# EAGLE board adonAA (EAGLE 6.5.0)
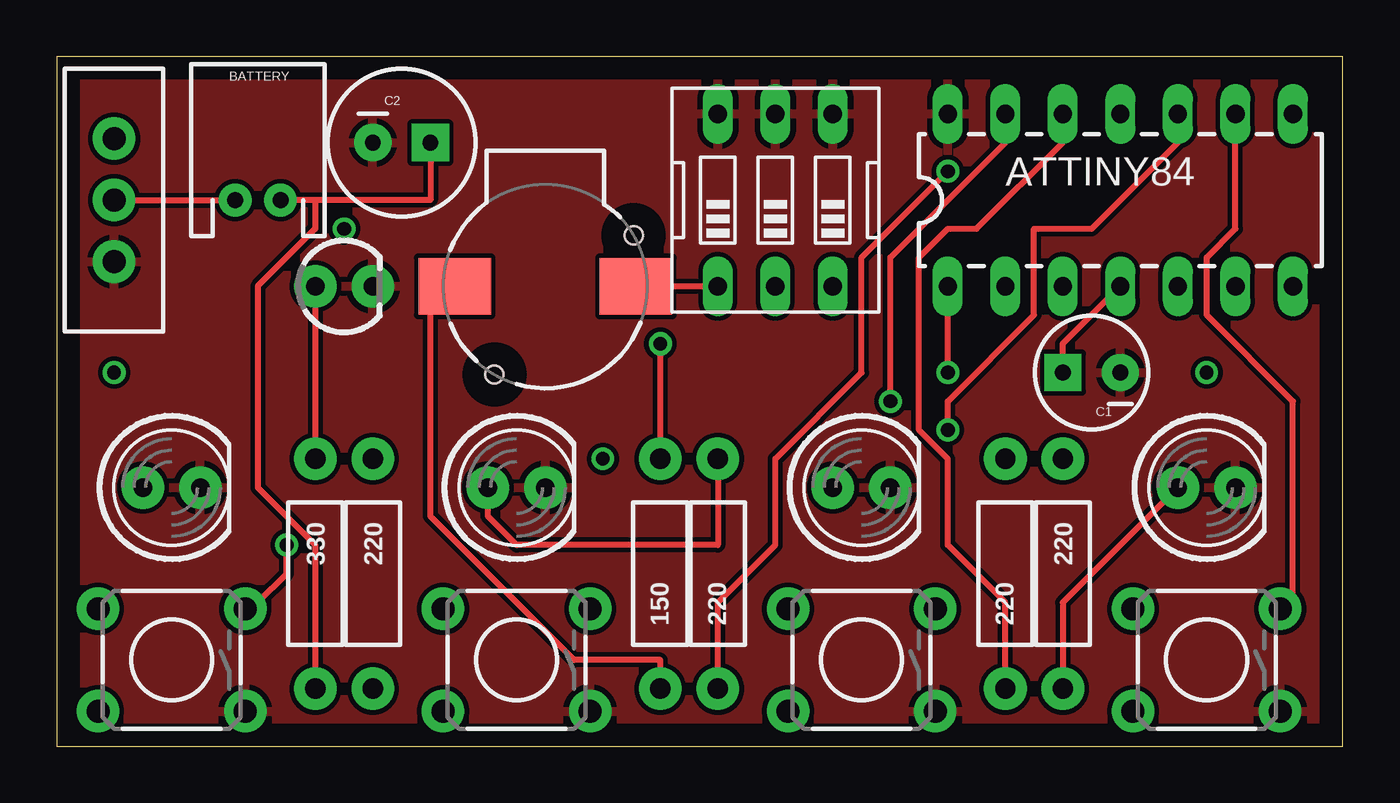
[diagram p0: board, top side]
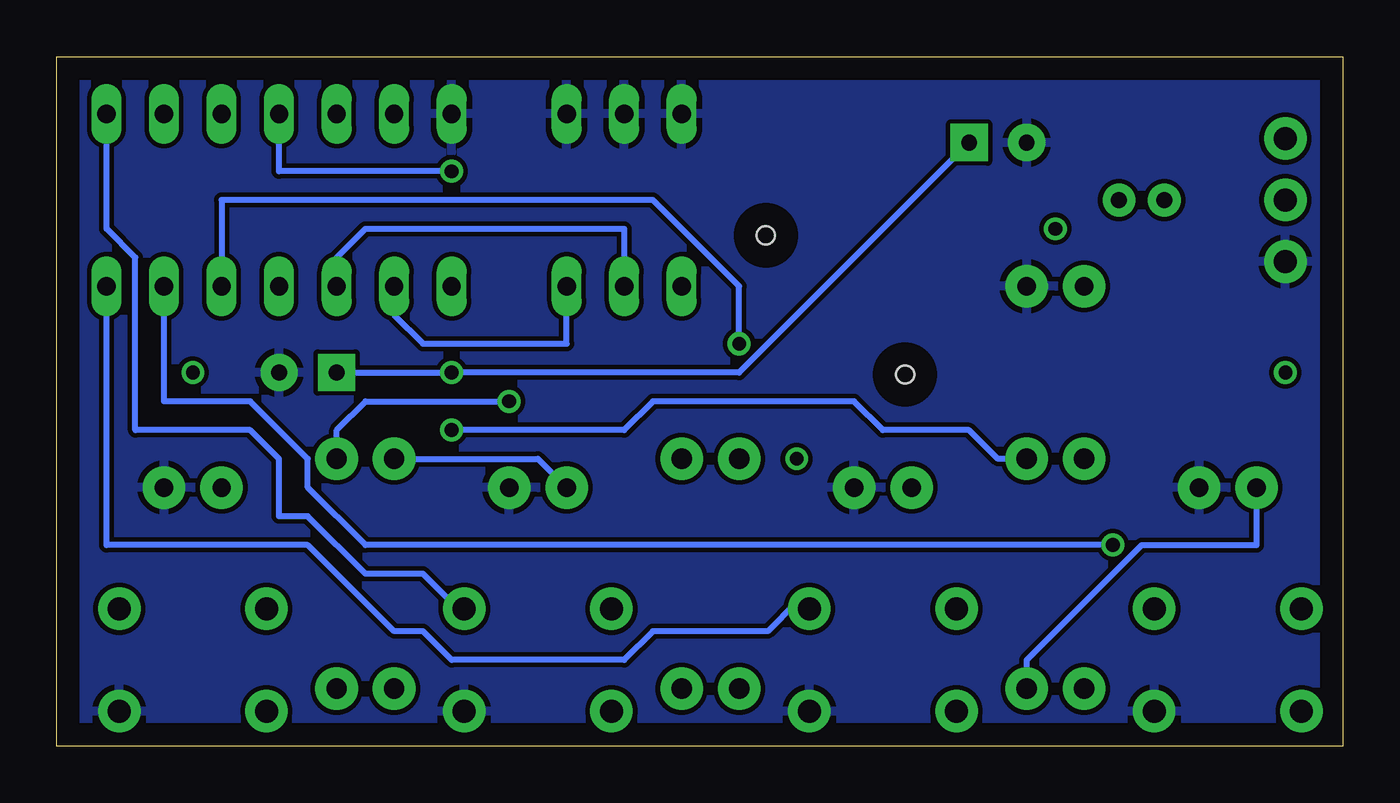
[diagram p1: board, bottom side, seen from below]

Size 56.82 x 30.47 mm. Coordinates in mm from the lower left corner, seen from the top.
Outline: 0,0 56.82,0 56.82,30.47 0,30.47 0,0
Copper layers (1*16): Top 0.035mm / dielectric 1.5mm / Bottom 0.035mm
Design rules "default": minimum track width 10mil, minimum drill 24mil, track to track 8mil, track to pad 8mil, pad to pad 8mil, via to via 8mil, smd to smd 8mil, copper to edge 40mil, drill to drill 8mil, minimum pad ring 10mil, minimum via ring 8mil, stop-mask expansion 4mil, vias tented up to drill 0mil, thermal gap 10mil

## Footprints (pad centres in the part's own frame; a part is rotated, then mirrored left to right if it is on the bottom)
DIL14 = drill 0.813 long: 1 -8.89,-3.81; 2 -6.35,-3.81; 3 -3.81,-3.81; 4 -1.27,-3.81; 5 1.27,-3.81; 6 3.81,-3.81; 7 6.35,-3.81; 8 6.35,3.81; 9 3.81,3.81; 10 1.27,3.81; 11 -1.27,3.81; 12 -3.81,3.81; 13 -6.35,3.81; 14 -8.89,3.81
JST-2-PTH = drill 0.7 pad 1.448: 1 -1,0; 2 1,0
TACTILE-PTH = drill 1.016 pad 1.88: 1 -3.251,2.261; 2 3.251,2.261; 3 -3.251,-2.261; 4 3.251,-2.261
BUZZER-CCV = smd 3.2 x 2.5: + 4,0; - -4,0 | hole 0.8: -3.9,-2.25; 2.25,3.9
CPOL-RADIAL-10UF-25V = drill 0.7 pad 1.651 square: 1 1.27,0 | drill 0.7 pad 1.651: 2 -1.27,0
CPOL-RADIAL-100UF-25V = drill 0.7 pad 1.651 square: 1 1.27,0 | drill 0.7 pad 1.651: 2 -1.27,0
LED5MM = drill 0.813 pad 1.88: A -1.27,0; K 1.27,0
LED3MM = drill 0.813 pad 1.88: A -1.27,0; K 1.27,0
AXIAL-0.4 = drill 0.9 pad 1.88: P$1 -5.08,0; P$2 5.08,0
SWITCH-SPDT_LOCK.007S = drill 1.016 pad 1.88: 1 0,2.718; 2 0,0; 3 0,-2.718
EDG-03 = drill 0.813 long: 1 -2.54,-3.81; 2 0,-3.81; 3 2.54,-3.81; 4 2.54,3.81; 5 0,3.81; 6 -2.54,3.81

## Placement (x,y rotation side)
ATTINY84  ATTINY84ATTINY84-20PU  [DIL14]  48.26,24.13 0 top
BATTERY  M02JST-PTH-2  [JST-2-PTH]  8.89,24.13 0 top
BUTTON1  B1  [TACTILE-PTH]  5.08,3.81 180 top
BUTTON2  B2  [TACTILE-PTH]  20.32,3.81 180 top
BUTTON3  B3  [TACTILE-PTH]  35.56,3.81 180 top
BUTTON4  B4  [TACTILE-PTH]  50.8,3.81 180 top
BUZZER  BUZZERSMD2  [BUZZER-CCV]  21.59,20.32 180 top
C1  10uF  [CPOL-RADIAL-10UF-25V]  45.72,16.51 180 top
C2  100uF  [CPOL-RADIAL-100UF-25V]  15.24,26.67 0 top
LED1  Green  [LED5MM]  5.08,11.43 0 top
LED2  Red  [LED5MM]  20.32,11.43 0 top
LED3  Yellow  [LED5MM]  35.56,11.43 0 top
LED4  Blue  [LED5MM]  50.8,11.43 0 top
PWRLED  RED  [LED3MM]  12.7,20.32 0 top
R6  330  [AXIAL-0.4]  11.43,7.62 270 top
R8  220  [AXIAL-0.4]  13.97,7.62 270 top
R13  220  [AXIAL-0.4]  29.21,7.62 90 top
R14  220  [AXIAL-0.4]  41.91,7.62 90 top
R15  220  [AXIAL-0.4]  44.45,7.62 270 top
R16  150  [AXIAL-0.4]  26.67,7.62 90 top
S1  POWER  [SWITCH-SPDT_LOCK.007S]  2.54,24.13 0 top
SW1  [EDG-03]  31.75,24.13 0 top

## Library data of the parts
ATTINY84 = SparkFun-DigitalIC
BATTERY = SparkFun-Connectors; SKU: PRT-09914
BUTTON1-BUTTON4 BUZZER S1 = SparkFun-Electromechanical
C1 C2 = SparkFun-Capacitors
LED1-LED4 PWRLED = SparkFun-LED
R6 R8 R13-R16 = SparkFun-Resistors
SW1 = special

## Nets
GND: ATTINY84.14 BUTTON1.1 BUTTON2.1 BUTTON3.1 BUTTON4.1 C1.2 C2.2 LED1.K LED2.K LED3.K LED4.K PWRLED.K S1.3 SW1.4 SW1.5 SW1.6
N$1: BUZZER.+ R16.P$1
N$2: PWRLED.A R6.P$1
N$3: LED1.A R8.P$2
N$4: LED2.A R13.P$2
N$5: ATTINY84.6 BUTTON1.3
N$6: ATTINY84.5 R16.P$2
N$7: LED3.A R14.P$2
N$8: LED4.A R15.P$2
N$9: ATTINY84.7 BUTTON2.3
N$10: ATTINY84.3 SW1.2
N$11: ATTINY84.2 SW1.3
N$12: BATTERY.1 S1.2
N$13: ATTINY84.8 BUTTON3.3
N$14: ATTINY84.9 BUTTON4.3
N$15: ATTINY84.10 R8.P$1
N$16: ATTINY84.11 R13.P$1
N$17: ATTINY84.12 R14.P$1
N$18: ATTINY84.13 R15.P$1
N$23: BUZZER.- SW1.1
VCC: ATTINY84.1 ATTINY84.4 BATTERY.2 C1.1 C2.1 R6.P$2

## Tracks (layer width: path | path; a pad name or v marks a point on that pad's centre or on a via)
GND
  pour Bottom: 0,30.48 0,0 57.15,0 57.15,30.48
  pour Top: 0,30.48 0,0 57.15,0 57.15,30.48
N$1
  Top 0.254: R16.P$1 26.67,3.81 22.86,3.81 16.51,10.16 16.51,20.32 BUZZER.+
N$2
  Top 0.254: PWRLED.A R6.P$1
N$3
  Bottom 0.254: LED1.A 3.81,8.89 8.89,8.89 13.97,3.81 R8.P$2
N$4
  Top 0.254: LED2.A 19.05,10.16 20.32,8.89 29.21,8.89 R13.P$2
N$5  (via drill 0.61)
  Top 0.254: v10.16,8.89 10.16,7.62 8.89,6.35 BUTTON1.3
  Bottom 0.254: ATTINY84.6 52.07,15.24 48.26,15.24 45.72,12.7 45.72,11.43 43.18,8.89 v10.16,8.89
N$6  (via drill 0.61)
  Top 0.254: R16.P$2 v26.67,17.78
  Bottom 0.254: ATTINY84.5 49.53,24.13 30.48,24.13 26.67,20.32 v26.67,17.78
N$7
  Bottom 0.254: LED3.A 35.56,12.7 R14.P$2
N$8
  Top 0.254: R15.P$2 44.45,6.35 LED4.A
N$9
  Bottom 0.254: ATTINY84.7 54.61,8.89 45.72,8.89 41.91,5.08 40.64,5.08 39.37,3.81 31.75,3.81 30.48,5.08 25.4,5.08 24.13,6.35 BUTTON2.3
N$10
  Bottom 0.254: SW1.2 31.75,22.86 43.18,22.86 44.45,21.59 ATTINY84.3
N$11
  Bottom 0.254: SW1.3 34.29,17.78 40.64,17.78 41.91,19.05 ATTINY84.2
N$12
  Top 0.254: S1.2 BATTERY.1
N$13
  Bottom 0.254: ATTINY84.8 54.61,22.86 53.34,21.59 53.34,13.97 48.26,13.97 46.99,12.7 46.99,10.16 45.72,10.16 43.18,7.62 40.64,7.62 39.37,6.35 BUTTON3.3
N$14
  Top 0.254: ATTINY84.9 52.07,22.86 50.8,21.59 50.8,19.05 54.61,15.24 54.61,6.35 BUTTON4.3
N$15  (via drill 0.61)
  Top 0.254: ATTINY84.10 49.53,26.67 45.72,22.86 43.18,22.86 43.18,19.05 39.37,15.24 v39.37,13.97
  Bottom 0.254: v39.37,13.97 31.75,13.97 30.48,15.24 21.59,15.24 20.32,13.97 16.51,13.97 15.24,12.7 R8.P$1
N$16  (via drill 0.61)
  Top 0.254: v39.37,25.4 35.56,21.59 35.56,16.51 31.75,12.7 31.75,8.89 29.21,6.35 R13.P$1
  Bottom 0.254: ATTINY84.11 46.99,25.4 v39.37,25.4
N$17
  Top 0.254: ATTINY84.12 44.45,26.67 40.64,22.86 39.37,22.86 38.1,21.59 38.1,13.97 39.37,12.7 39.37,8.89 41.91,6.35 R14.P$1
N$18  (via drill 0.61)
  Top 0.254: ATTINY84.13 41.91,26.67 36.83,21.59 v36.83,15.24
  Bottom 0.254: v36.83,15.24 43.18,15.24 44.45,13.97 R15.P$1
N$19  (via drill 0.6)
  other vias: 2.54,16.51
N$20  (via drill 0.6)
  other vias: 24.13,12.7
N$21  (via drill 0.6)
  other vias: 50.8,16.51
N$22  (via drill 0.6)
  other vias: 12.7,22.86
N$23
  Top 0.254: BUZZER.- SW1.1
VCC  (via drill 0.61)
  Top 0.254: v39.37,16.51 ATTINY84.1 | ATTINY84.4 44.45,17.78 C1.1 | 11.43,24.13 16.51,24.13 C2.1 | 11.43,24.13 BATTERY.2 | R6.P$2 11.43,8.89 8.89,11.43 8.89,20.32 11.43,22.86 11.43,24.13
  Bottom 0.254: C1.1 v39.37,16.51 26.67,16.51 C2.1